# Altium PCB PCB_TUD-EHC-CrankModule_3.pcbdoc
Units mm, origin at the board's own origin, x right, y up, seen from the top; angles counter-clockwise.
Board outline 74.31 x 35.93 mm, 2 copper layers (Top Layer, Bottom Layer); 48 components, 30 nets, 147 pads, 43 vias.
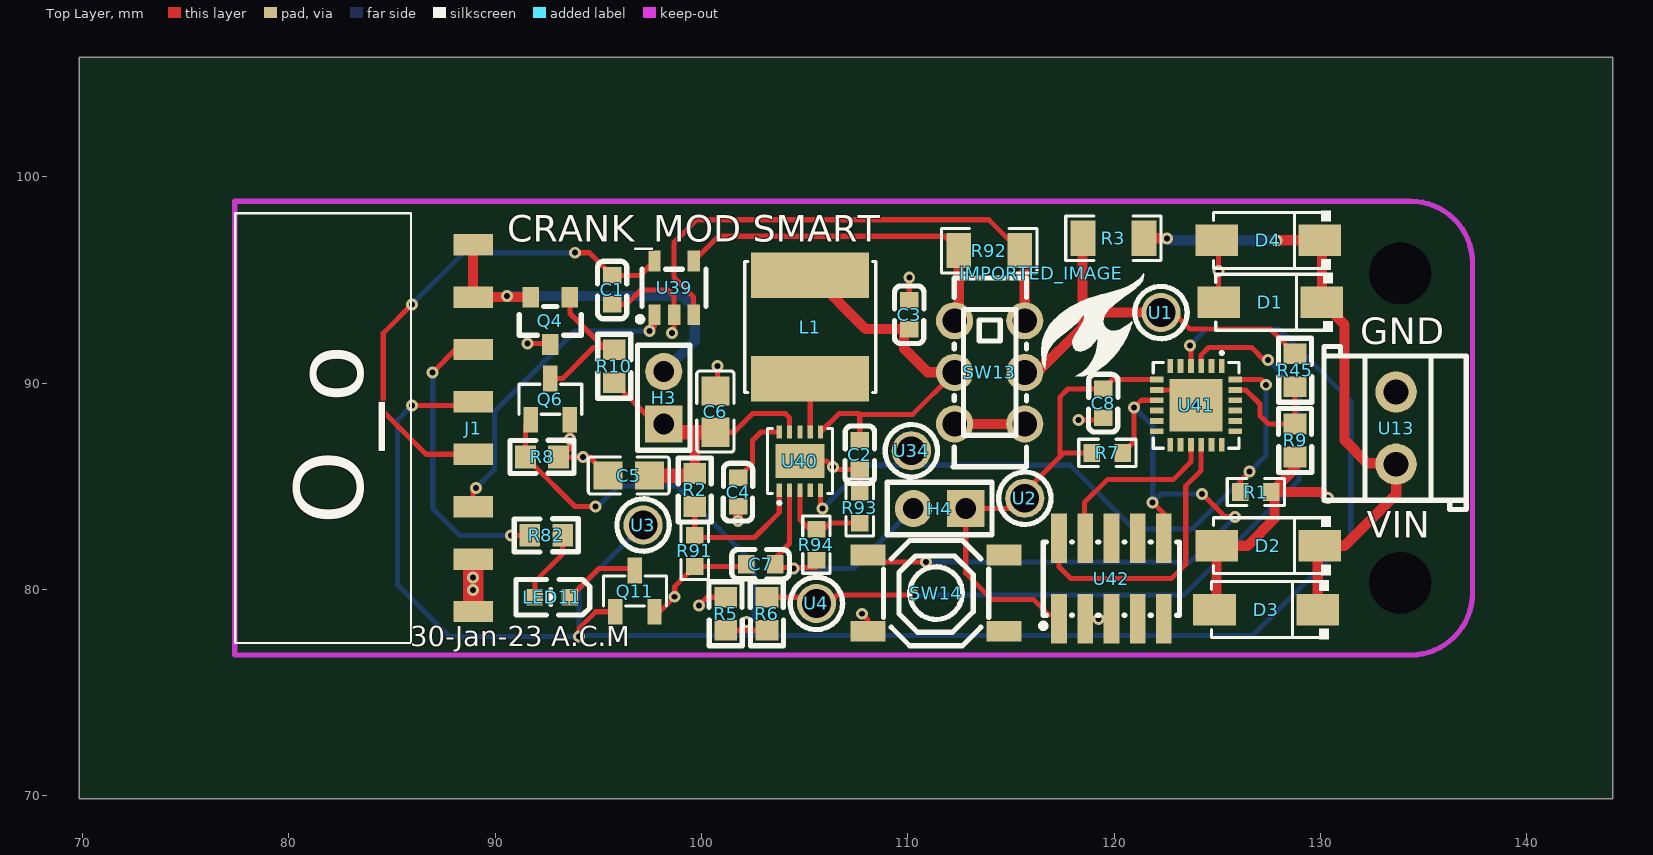
[diagram p0: Top Layer view]
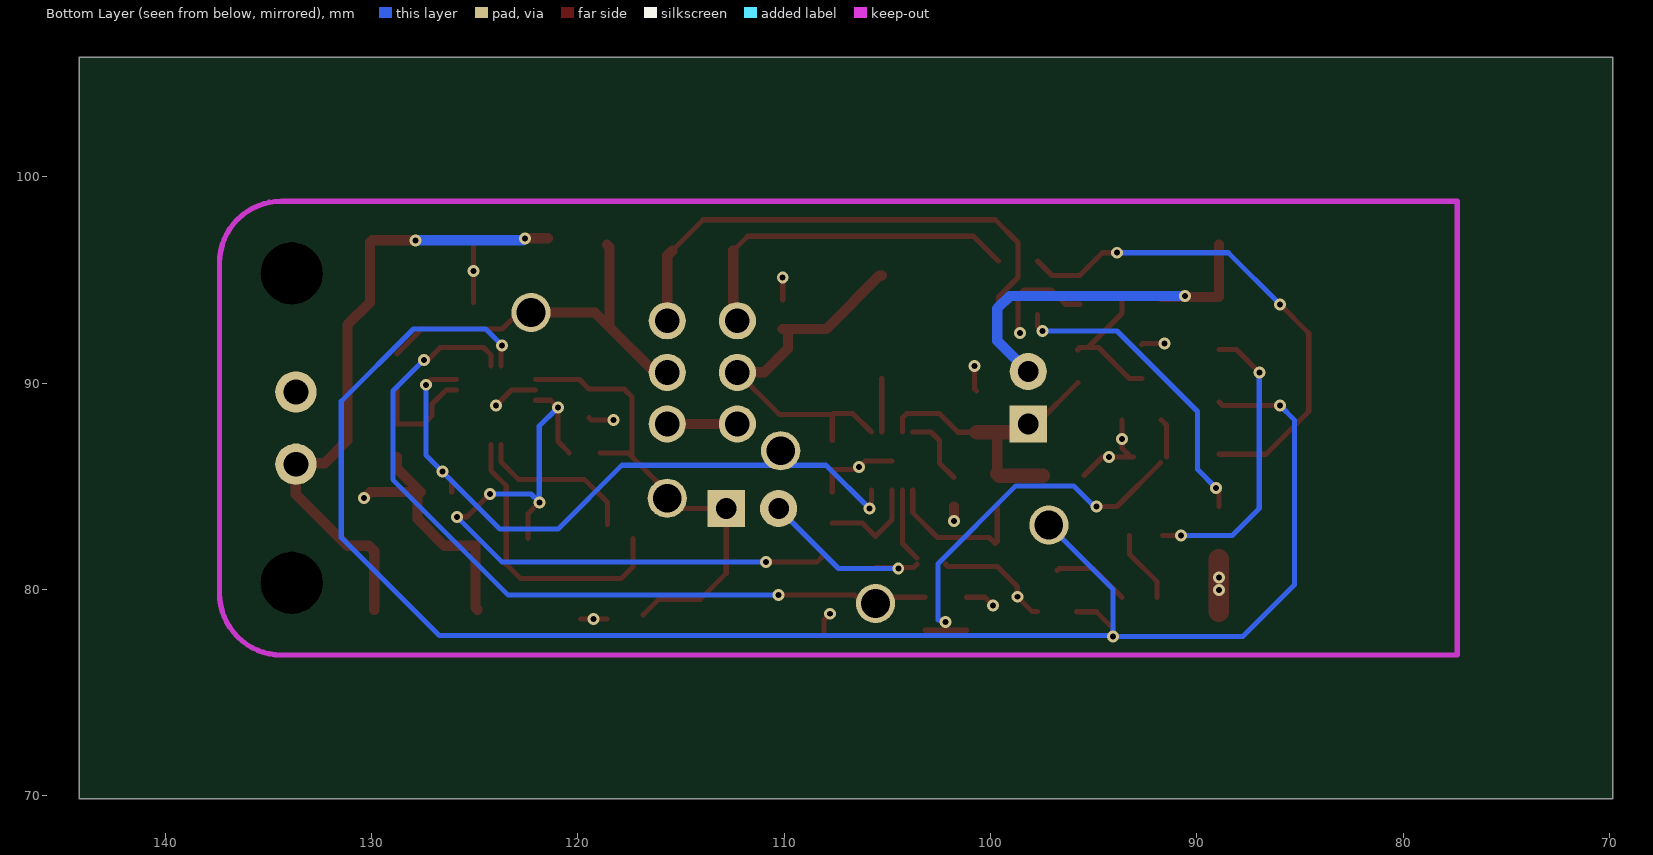
[diagram p1: Bottom Layer view, seen from below]

## Layer stack, top to bottom
Top Layer: signal copper (thickness not stored)
Dielectric: dielectric 0.32, FR-4, Dk 4.8
Bottom Layer: signal copper (thickness not stored)

## Board outline
144.162,69.85 69.85,69.85 69.85,105.78 144.162,105.78
cut-out: 135.373,95.315 ccw(c133.873,95.315) 132.373,95.315 ccw(c133.873,95.315)
cut-out: 135.373,80.315 ccw(c133.873,80.315) 132.373,80.315 ccw(c133.873,80.315)

## Components (designator, comment, footprint, x,y, rotation, side; value= is the part's Value field where it differs from the comment)
C1 "100nF" C0603 95.673,94.515 r90 top
C2 "CL10A106MA8NRNC" C0603 107.673,86.515 r270 top
C3 "CL10A106MA8NRNC" C0603 110.073,93.315 r90 top
C4 "CL10A105KB8NNNC" C0603 101.773,84.715 r90 top
C5 "CL21A226MAQNNNE_C45783" C0805 96.473,85.515 r0 top
C6 "CL21A226MAQNNNE_C45783" C0805 100.673,88.615 r270 top
C7 "CL10A106MA8NRNC" C0603 102.873,81.215 r0 top
C8 "100nF" C0603 119.473,89.015 r270 top
D1 "SS54" SMA_L4.4-W2.8-LS5.4-R-RD 127.573,93.915 r180 top
D2 "SS54" SMA_L4.4-W2.8-LS5.4-R-RD 127.473,82.115 r180 top
D3 "SS54" SMA_L4.4-W2.8-LS5.4-R-RD 127.373,79.015 r180 top
D4 "SS54" SMA_L4.4-W2.8-LS5.4-R-RD 127.473,96.915 r180 top
H3 "OUT bypass" HDR-TH_2P-P2.54-V-M-1 98.173,89.285 r90 top
H4 "HDR-M_2.54_1x2P" HDR-TH_2P-P2.54-V-M-1 111.543,83.915 r180 top
IMPORTED_IMAGE "IMPORTED_IMAGE" IMPORTED_IMAGE 116.473,95.315 r0 top
J1 "SMH-108-02-G-S-TR" SMH-108-02-XX-S-TR 88.93,87.815 r270 top
L1 "CKCS6028-10uH/M" IND-SMD_L6.0-W6.0 105.273,92.715 r90 top
LED11 "KT-0603R" LED0603-R-RD 92.773,79.615 r180 top
Q4 "AO3401A" SOT-23_L2.9-W1.3-P1.90-LS2.4-BR 92.673,93.015 r90 top
Q6 "SI2302" SOT-23-3_L2.9-W1.3-P1.90-LS2.4-BR 92.673,89.215 r270 top
Q11 "AO3400A" SOT-23-3_L2.9-W1.3-P1.90-LS2.4-BR 96.773,79.915 r270 top
R1 "0603WAF1003T5E" R0603#1 126.873,84.715 r180 top
R2 "3MΩ" R0603#2 99.673,84.815 r270 top
R3 "1206W3F500MT5E_C127691" R1206 119.973,97.015 r180 top
R5 "DNP" R0603#2 101.173,78.815 r90 top
R6 "1kΩ" R0603#2 103.173,78.815 r90 top
R7 "0603WAF1003T5E" R0603#1 119.673,86.615 r0 top
R8 "3MΩ" R0603#2 92.273,86.415 r0 top
R9 "20kΩ" R0603#2 128.773,87.215 r270 top
R10 "3MΩ" R0603#2 95.773,90.815 r270 top
R45 "20kΩ" R0603#2 128.773,90.615 r270 top
R82 "1kΩ" R0603#2 92.473,82.615 r180 top
R91 "0603WAF7503T5E" R0603#1 99.673,81.862 r90 top
R92 "1206W3F500MT5E_C127691" R1206 113.952,96.415 r0 top
R93 "0603WAF1003T5E" R0603#1 107.673,83.962 r270 top
R94 "0603WAF2003T5E" R0603#1 105.573,82.162 r270 top
SW13 "K3-2235D-F1" SW-TH_K3-2235D-F1 113.973,90.515 r270 top
SW14 "TS-1187A-B-A-B" SW-SMD_4P-L5.1-W5.1-P3.70-LS6.5-TL-2 111.373,79.815 r0 top
U1 "5001" TEST-TH_BD2.54-P1.39 122.273,93.415 r0 top
U2 "5001" TEST-TH_BD2.54-P1.39 115.673,84.415 r0 top
U3 "5001" TEST-TH_BD2.54-P1.39 97.173,83.115 r0 top
U4 "5001" TEST-TH_BD2.54-P1.39 105.573,79.315 r0 top
U13 "KF350-3.5-2P" CONN-TH_P3.50_KF350-3.5-2P 133.673,87.815 r90 top
U34 "5001" TEST-TH_BD2.54-P1.39 110.173,86.715 r0 top
U39 "INA180A3IDBVR" SOT-23-5_L3.0-W1.7-P0.95-LS2.8-BR 98.673,94.615 r270 top
U40 "LTC3105EDD#PBF" DFN-10_L3.0-W3.0-P0.50-BL-EP_LTC3105EDD 104.773,86.215 r0 top
U41 "NHS3152/A1Z" QFN-24_L4.0-W4.0-P0.50-BL-EP2.6 123.973,88.915 r180 top
U42 "20021121-00010T4LF" HDR-SMD_10P-P1.27-V-M-R2-C5-S1.27-LS5.5 119.873,80.515 r0 top

## Footprints (in the part's own frame and the unit in brackets; to place one, negate y for a bottom-side part, rotate by r counter-clockwise, add the part's x,y. Pads: shape width x height; smd on the part's side, far side on the other; paste and mask are expansions set on the pad)
C0603 [mm]
  rect 0.8x0.9 smd paste+0 mask+0.051: 1(-0.7,0) 2(0.7,0)
  silkscreen extent -1.41,-0.71 1.39,0.72
C0805 [mm]
  rect 1.41x1.35 smd paste-100 mask+0.051: 1(-1,0) 2(1,0)
  silkscreen extent -1.96,-0.9 1.96,0.9
CONN-TH_P3.50_KF350-3.5-2P [mm]
  round 2 hole 1.2 paste+0 mask+0.051: 1(-1.75,0) 2(1.75,0)
  silkscreen extent -3.95,-3.4 3.95,3.5
DFN-10_L3.0-W3.0-P0.50-BL-EP_LTC3105EDD [mm]
  rect 0.25x0.65 smd paste+0 mask+0.051: 1(-1,-1.411) 2(-0.5,-1.411) 3(0,-1.411) 4(0.5,-1.411) 5(1,-1.411) 6(1,1.411) 7(0.5,1.411) 8(0,1.411) 9(-0.5,1.411) 10(-1,1.411)
  rect 2.38x1.65 smd paste+0 mask+0.051: 11(0,0)
  silkscreen extent -1.58,-2.1 1.58,1.58
HDR-SMD_10P-P1.27-V-M-R2-C5-S1.27-LS5.5 [mm]
  rect 0.76x2.4 smd paste+0 mask+0.051: 1(-2.54,-1.95) 2(-2.54,1.95) 3(-1.27,-1.95) 4(-1.27,1.95) 5(0,-1.95) 6(0,1.95) 7(1.27,-1.95) 8(1.27,1.95) 9(2.54,-1.95) 10(2.54,1.95)
  silkscreen extent -3.43,-2.41 3.3,1.78
HDR-TH_2P-P2.54-V-M-1 [mm]
  rect 1.8x1.8 hole 1 paste+0 mask+0.051: 1(-1.27,0)
  round 1.8 hole 1 paste+0 mask+0.051: 2(1.27,0)
  silkscreen extent -2.54,-1.27 2.54,1.27
IMPORTED_IMAGE [mm]
  silkscreen extent 0,-5 5,0
IND-SMD_L6.0-W6.0 [mm]
  rect 2.2x5.72 smd paste+0 mask+0.051: 1(-2.5,0) 2(2.5,0)
  silkscreen extent -3.18,-3.18 3.18,3.18
LED0603-R-RD [mm]
  rect 0.8x0.8 smd paste+0 mask+0.051: 1(0.851,0) 2(-0.851,0)
  silkscreen extent -1.82,-0.86 1.77,0.86
QFN-24_L4.0-W4.0-P0.50-BL-EP2.6 [mm]
  rect 0.28x0.665 smd paste-100 mask+0.05: 1(-1.25,-1.908) 2(-0.75,-1.908) 3(-0.25,-1.908) 4(0.25,-1.908) 5(0.75,-1.908) 6(1.25,-1.908) 13(1.25,1.908) 14(0.75,1.908) 15(0.25,1.908) 16(-0.25,1.908) 17(-0.75,1.908) 18(-1.25,1.908)
  rect 0.665x0.28 smd paste-100 mask+0.05: 7(1.908,-1.25) 8(1.908,-0.75) 9(1.908,-0.25) 10(1.908,0.25) 11(1.908,0.75) 12(1.908,1.25) 19(-1.908,1.25) 20(-1.908,0.75) 21(-1.908,0.25) 22(-1.908,-0.25) 23(-1.908,-0.75) 24(-1.908,-1.25)
  rect 2.55x2.55 smd paste-100 mask+0.05: 25(0,0)
  silkscreen extent -2.08,-2.61 2.08,2.08
R0603#1 [mm]
  rect 0.806x0.864 smd paste-100 mask+0.051: 1(-0.753,0) 2(0.753,0)
  silkscreen extent -1.39,-0.66 1.39,0.66
R0603#2 [mm]
  rect 1x1.1 smd paste+0 mask+0.051: 1(-0.8,0) 2(0.8,0)
  silkscreen extent -1.55,-0.8 1.55,0.81
R1206 [mm]
  rect 1.208x1.701 smd paste-100 mask+0.051: 1(-1.479,0) 2(1.479,0)
  silkscreen extent -2.31,-1.08 2.31,1.08
SMA_L4.4-W2.8-LS5.4-R-RD [mm]
  rect 2.063x1.539 smd paste+0 mask+0.051: 1(2.504,0) 2(-2.504,0)
  silkscreen extent -3.03,-1.43 2.65,1.43
SMH-108-02-XX-S-TR [mm]
  rect 1.04x1.91 smd paste+0 mask+0.051: 1(-8.89,0) 2(-6.35,0) 3(-3.81,0) 4(-1.27,0) 5(1.27,0) 6(3.81,0) 7(6.35,0) 8(8.89,0)
  silkscreen extent -10.42,-11.53 10.42,-3.02
SOT-23-3_L2.9-W1.3-P1.90-LS2.4-BR [mm]
  rect 1.25x0.7 smd paste+0 mask+0.051: 1(1,-0.95) 2(1,0.95) 3(-1,0)
  silkscreen extent -0.73,-1.53 0.73,1.53
SOT-23-5_L3.0-W1.7-P0.95-LS2.8-BR [mm]
  rect 1x0.6 smd paste+0 mask+0.051: 1(1.3,-0.95) 2(1.3,0) 3(1.3,0.95) 4(-1.3,0.95) 5(-1.3,-0.95)
  silkscreen extent -0.9,-1.78 1.65,1.55
SOT-23_L2.9-W1.3-P1.90-LS2.4-BR [mm]
  rect 1x0.8 smd paste+0 mask+0.051: 1(1.15,-0.95) 2(1.15,0.95) 3(-1.15,0)
  silkscreen extent -0.7,-1.5 0.7,1.5
SW-SMD_4P-L5.1-W5.1-P3.70-LS6.5-TL-2 [mm]
  rect 1.7x1 smd paste+0 mask+0.051: 1(-3.3,1.85) 2(3.3,1.85) 3(-3.3,-1.85) 4(3.3,-1.85)
  silkscreen extent -2.55,-2.55 2.55,2.55
SW-TH_K3-2235D-F1 [mm]
  round 1.8 hole 1.2 paste+0 mask+0.051: 1(-2.5,1.7) 2(0,1.7) 3(2.5,1.7) 4(-2.5,-1.7) 5(0,-1.7) 6(2.5,-1.7)
  silkscreen extent -4.57,-1.78 4.57,1.78
TEST-TH_BD2.54-P1.39 [mm]
  round 1.9 hole 1.39 paste+0 mask+0.051: 1(0,0)
  silkscreen extent -1.27,-1.27 1.27,1.27

## Via types
v1: diameter 0.58, hole 0.29, Top Layer to Bottom Layer, 43 vias

## Nets (pads, with @x,y where several pads share a name; then routed paths per layer and width w, separated by ;. In a path a pad name is that pad's centre, name@x,y a point inside that pad or via, vN(x,y) a via of type N, cw(c..) or ccw(c..) an arc to the next point about the centre after c; other vN are vias at no path point)
#CRANK_STOR_RDY: Q4.1 Q6.3 R10.1 | length 6.9
  Top Layer w0.248: Q6.3 93.273,90.215 94.773,91.715 R10.1@95.273,91.715 ; Q4.1 93.623,93.365 R10.1@95.273,91.715 ; R10.1 95.673,91.715 R10.1@95.273,91.715
$1N8877: LED11.2 Q11.3 | length 3.8
  Top Layer w0.248: LED11.2 95.024,81.015 96.673,81.015 Q11.3
$1N8878: LED11.1 R82.1 | length 3.6
  Top Layer w0.248: LED11.1 91.922,80.364 93.273,81.715 R82.1
$1N11886: Q6.1 R5.1 R6.1 R8.1 | length 21.1
  Top Layer w0.248: R8.1 91.473,87.965 Q6.1 ; R8.1@91.753,86.135 93.873,84.015 v1(94.873,84.015) ; R5.1 102.17,78.015 ; v1(102.173,78.415) 102.17,78.412 102.17,78.015 ; R6.1 102.17,78.015
  Bottom Layer w0.248: v1(94.873,84.015) 94.973,84.015 95.973,85.015 98.773,85.015 102.556,81.232 102.556,78.515 102.273,78.515 v1(102.173,78.415)
$1N13552: R92.1 SW13.4 U39.4 | length 17.1
  Top Layer w0.248: U39.4 100.823,97.115 111.773,97.115 R92.1
  Top Layer w0.5: SW13.4 112.473,93.215 R92.1
$1N13553: R92.2 SW13.1 U39.3 | length 25.2
  Top Layer w0.248: U39.3 99.623,94.165 98.673,95.115 98.673,96.815 99.773,97.915 113.93,97.915 R92.2
  Top Layer w0.5: R92.2 115.673,96.172 SW13.1
$1N13554: SW13.3 SW13.6 | length 3.4
  Top Layer w0.5: SW13.6 SW13.3
$1N18080: D1.2 D2.2 D3.2 D4.2 R3.1 U13.1 | length 31.1
  Top Layer w0.248: D2.2 D2.2@130.144,82.115
  Top Layer w0.5: R3.1 v1(122.573,97.015) ; v1(127.873,96.915) D4.2 130.077,96.815 D1.2 131.173,92.819 131.173,87.215 132.273,86.115 133.623,86.115 U13.1 133.673,84.615 131.173,82.115 130.144,82.115 129.877,81.847 D3.2
  Bottom Layer w0.5: v1(122.573,97.015) 122.673,96.915 v1(127.873,96.915)
$1N23327: L1.1 U40.7 | length 2.6
  Top Layer w0.248: U40.7 L1.1
$1N23686: C4.2 U40.10 | length 3.6
  Top Layer w0.248: C4.2 102.473,86.115 102.473,87.215 102.884,87.626 U40.10
$1N25297: R2.2 R91.2 U40.1 | length 7.6
  Top Layer w0.248: R2.2 99.673,82.315 99.773,82.215 100.073,82.515 102.573,82.515 103.773,83.715 U40.1
$1N29355: R93.2 R94.1 U40.3 | length 4.9
  Top Layer w0.248: U40.3 104.773,83.368 105.573,82.568 106.22,83.215 107.666,83.215 R93.2
$2N915: R9.1 R45.2 U41.23 | length 5.7
  Top Layer w0.248: U41.23 126.387,89.665 127.073,88.979 127.073,88.415 127.473,88.015 R9.1 R45.2
CONN_IN: R3.2 R45.1 SW13.2 U1.1 | length 19.2
  Top Layer w0.248: U1.1@122.873,93.415 123.673,92.615 127.573,92.615
  Top Layer w0.25: 127.573,92.615 R45.1
  Top Layer w0.5: SW13.2 116.273,90.515 118.473,92.715 ; R3.2@118.594,96.715 118.473,96.594 118.473,92.715 ; U1.1@122.873,93.415 U1.1 119.173,93.415 118.473,92.715
CRANK_OK: J1.4 Q11.1 U3.1 U41.4 | length 87.6
  Top Layer w0.248: v1(85.973,88.915) 88.76,88.915 J1.4 ; v1(94.073,77.715) 94.073,78.115 94.873,78.915 Q11.1 ; v1(123.673,91.815) 123.723,91.765 U41.4
  Bottom Layer w0.248: v1(85.973,88.915) 85.273,88.215 85.273,80.215 87.773,77.715 v1(94.073,77.715) ; U3.1 94.073,80.015 v1(94.073,77.715) ; v1(123.673,91.815) 124.473,92.615 127.973,92.615 131.473,89.115 131.473,82.515 126.711,77.753 94.111,77.753 v1(94.073,77.715)
CRANK_STOR: C5.2 C6.2 H3.1 Q4.3 R2.1 R10.2 U40.9 | length 24.3
  Top Layer w0.248: v1(91.573,91.915) 92.623,91.915 Q4.3 ; R10.2 97.773,88.015 H3.1 ; C6.2 101.573,87.615 102.473,88.515 104.073,88.515 104.273,88.315 U40.9
  Top Layer w0.5: 99.545,87.615 99.673,87.487 R2.1
  Top Layer w0.7: C5.2 99.573,85.515 R2.1 ; H3.1 98.573,87.615 99.545,87.615 C6.2
  V+ w1: v1(91.573,91.915) 92.987,91.915 96.887,88.015 H3.1
CURR_SENSE: J1.6 U39.1 | length 15.1
  Top Layer w0.248: J1.6 88.93,84.772 v1(89.073,84.915) ; v1(97.473,92.515) 97.723,92.765 U39.1
  Bottom Layer w0.248: v1(89.073,84.915) 89.973,85.815 89.973,88.615 93.873,92.515 v1(97.473,92.515)
DEBUG_5V: J1.3 R82.2 | length 14.3
  Top Layer w0.248: v1(86.973,90.515) 88.083,91.625 J1.3 ; v1(90.773,82.615) R82.2
  Bottom Layer w0.248: v1(86.973,90.515) 86.973,83.915 88.273,82.615 v1(90.773,82.615)
GND: C1.1 C2.2 C3.2 C4.1 C5.1 C6.1 C7.1 C8.2 D1.1 D2.1 D3.1 D4.1 J1.7 J1.8 Q6.2 Q11.2 R1.1 R8.2 R9.2 R91.1 R93.1 SW14.3 U13.2 U39.2 U40.11 U41.8 U41.25 U42.3 U42.5 | length 47.1
  Top Layer w0.248: R8.2 R8.2@93.201,86.415 ; Q6.2 v1(93.623,87.295) 93.623,86.837 R8.2@93.201,86.415 ; C5.1 94.573,86.415 v1(94.248,86.415) R8.2@93.201,86.415 ; C1.1 96.373,93.815 97.073,94.515 98.373,94.515 98.673,94.215 U39.2 98.673,92.515 v1(98.573,92.415) ; Q11.2 97.98,78.915 v1(98.704,79.639) 98.704,80.139 R91.1 102.066,81.108 C7.1 ; C6.1 100.773,89.715 v1(100.773,90.815) ; U40.11 106.073,86.215 106.473,85.815 C2.2 R93.1 ; v1(107.773,78.815) 108.073,78.515 SW14.3 ; C3.2 v1(110.073,95.115) ; v1(118.273,88.215) 119.373,88.215 C8.2 ; U42.3 v1(119.242,78.565) U42.5 ; U41.8 123.223,89.665 v1(123.973,88.915) ; D4.1 125.069,96.815 v1(125.069,95.429) D1.1 ; R1.1@127.626,84.715 R1.1@127.928,84.715
  Top Layer w0.5: v1(101.773,83.315) C4.1 ; D3.1 124.969,79.115 D2.1 126.473,82.115 127.773,83.415 127.773,84.56 127.928,84.715 130.073,84.715 v1(130.373,84.415) ; R1.1@127.626,84.715 128.773,85.862 R9.2
  Top Layer w1: J1.8 v1(88.93,79.96) v1(88.93,80.576) J1.7
  other v1: 106.367,85.921
LDO_3V: C7.2 H4.2 R5.2 R94.2 U40.2 | length 19.5
  Top Layer w0.248: v1(99.873,79.215) 100.273,79.615 R5.2 ; C7.2@103.573,81.515 104.273,82.215 U40.2 ; C7.2 103.726,81.062 v1@104.496,81.062 ; v1(104.473,81.015) 104.473,81.038 v1@104.496,81.062 ; R94.2@105.573,81.062 v1@104.496,81.062
  V+ w0.248: v1(99.873,79.215) 101.673,81.015 v1(104.473,81.015)
  Bottom Layer w0.248: v1(104.473,81.015) 107.373,81.015 H4.2
MAIN_STOR: H3.2 J1.1 J1.2 Q4.2 | length 18.4
  Top Layer w0.248: v1(90.573,94.215) 90.573,94.176 v1@90.584,94.165
  Top Layer w0.5: J1.1 J1.2 90.584,94.165 Q4.2
  Bottom Layer w0.5: v1(90.573,94.215) 99.073,94.215 99.673,93.615 99.673,92.055 H3.2
MPPC_INPUT: R1.2 U34.1 U40.5 U41.24 | length 32.3
  Top Layer w0.248: U40.5 105.773,84.015 v1(105.873,83.915) ; U41.24 127.123,90.165 v1(127.373,89.915) ; R1.2 126.12,85.262 v1(126.573,85.715)
  Bottom Layer w0.248: v1(105.873,83.915) 107.973,86.015 117.873,86.015 120.973,82.915 123.773,82.915 v1(126.573,85.715) 127.373,86.515 v1(127.373,89.915)
OUT_EN: R6.2 U4.1 U41.3 | length 39.4
  Top Layer w0.248: R6.2 104.873,79.615 105.673,78.815 106.573,79.715 v1(110.273,79.715) ; U41.3 124.223,91.365 124.573,91.715 126.673,91.715 127.273,91.115 v1(127.473,91.115)
  Bottom Layer w0.248: v1(110.273,79.715) 123.373,79.715 128.973,85.315 128.973,89.615 v1(127.473,91.115)
PWR_IN: C2.1 C3.1 L1.2 SW13.5 U40.6 | length 18.7
  Top Layer w0.248: U40.6 106.661,88.515 107.64,88.515 107.673,88.482 ; C2.1 107.673,88.482 ; SW13.5 110.24,88.482 107.673,88.482
  Top Layer w0.5: L1.2 105.373,95.215 107.973,92.615 C3.1@109.82,92.615 ; C3.1 C3.1@109.82,92.615 ; SW13.5 110.973,90.515 109.82,91.668 C3.1@109.82,92.615
RESET: R7.2 SW14.1 U41.9 U42.10 | length 34.1
  Top Layer w0.248: SW14.1 108.423,81.315 v1(110.873,81.315) ; R7.2 120.973,87.162 v1(120.973,88.815) 121.323,89.165 U41.9 ; v1(121.873,84.215) 122.413,83.675 U42.10 ; v1(124.273,84.615) 125.373,83.515 v1(125.873,83.515)
  Bottom Layer w0.248: v1(110.873,81.315) 123.673,81.315 v1(125.873,83.515) ; v1(120.973,88.815) 121.873,87.915 v1(121.873,84.215) 122.273,84.615 v1(124.273,84.615)
SWD/CLK: U41.15 U42.4 | length 7.9
  Top Layer w0.248: U42.4@118.573,83.135 118.573,84.215 119.673,85.315 122.873,85.315 123.723,86.165 U41.15
SWD/IO: U41.16 U42.2 | length 14.1
  Top Layer w0.248: U42.2 117.333,81.09 117.908,80.515 122.773,80.515 123.473,81.215 123.473,85.015 124.223,85.765 U41.16
V_SENSING: C1.2 J1.5 U39.5 | length 24.5
  Top Layer w0.248: v1(85.973,93.815) 84.573,92.415 84.573,88.615 86.643,86.545 J1.5 ; v1(93.873,96.315) 94.573,96.315 C1.2 97.023,95.215 U39.5
  Bottom Layer w0.248: v1(85.973,93.815) 88.473,96.315 v1(93.873,96.315)
VBAT: C8.1 H4.1 R7.1 U2.1 U41.7 U42.1 | length 23.2
  Top Layer w0.248: 116.833,78.765 116.083,79.515 114.073,79.515 112.813,80.775 H4.1 114.873,83.915 117.373,86.415 ; R7.1 117.573,86.615 117.373,86.415 ; U41.7 119.923,90.165 C8.1 117.773,89.715 117.373,89.315 117.373,86.415
"": SW14.2 SW14.4 U40.4 U40.8 U41.1 U41.2 U41.5 U41.6 U41.10 U41.11 U41.12 U41.13 U41.14 U41.17 U41.18 U41.19 U41.20 U41.21 U41.22 U42.6 U42.7 U42.8 U42.9

## Polygon pours and split planes (outlines as drawn)
GND on GND (split plane): 137.222,79.815 cw(c135.792,78.397) 134.376,76.965 ccw(c134.374,76.95) 134.373,76.966 80.474,76.966 77.524,76.966 77.524,98.664 134.371,98.664 134.373,98.664 cw(c135.798,97.24) 137.222,95.815 137.222,79.819 ccw(c137.236,79.817)
GND on GND (split plane): 133.17,88.306 133.17,89.565 134.175,89.565 134.175,88.306
GND on GND (split plane): 134.175,90.824 134.175,89.565 133.17,89.565 133.17,90.824
GND on GND (split plane): 132.414,90.067 133.673,90.067 133.673,89.062 132.414,89.062
GND on GND (split plane): 133.673,90.067 134.932,90.067 134.932,89.062 133.673,89.062

## Keep-outs
Board Outline Layer:
  lines w0.254 net "": 77.373,76.816 80.474,76.815 134.373,76.815 ; 77.373,76.815 77.373,98.815 134.371,98.815 ; 134.373,98.815 cw(c134.373,95.815) 137.373,95.815 137.373,79.815 ; 134.373,76.815 ccw(c134.373,79.815) 137.373,79.815 ; 134.373,76.815 ccw(c134.373,79.815) 137.373,79.815

## Silkscreen, mask and mechanical layers (free items; w line width, h text height)
Top Silkscreen Layer:
  text "CRANK_MOD SMART" at 90.578,96.859 h1.3
  text "GND" at 131.938,91.888 h1.29
  text "O_o" at 83.584,83.125 h3.35 r90
  text "VIN" at 132.238,82.488 h1.29
  text "30-Jan-23 A.C.M" at 85.877,77.248 h0.97
Mechanical Layer:
  circle w0.025 net "": c133.873,95.315 r1.5
  circle w0.025 net "": c133.873,80.315 r1.5